# Altium PCB PCB Wall_V0.0.PcbDoc
Units mm, origin at the board's own origin, x right, y up, seen from the top; angles counter-clockwise.
Board outline 70 x 35 mm, 2 copper layers (Top Layer, Bottom Layer); 1 components, 7 nets, 11 pads, 0 vias.
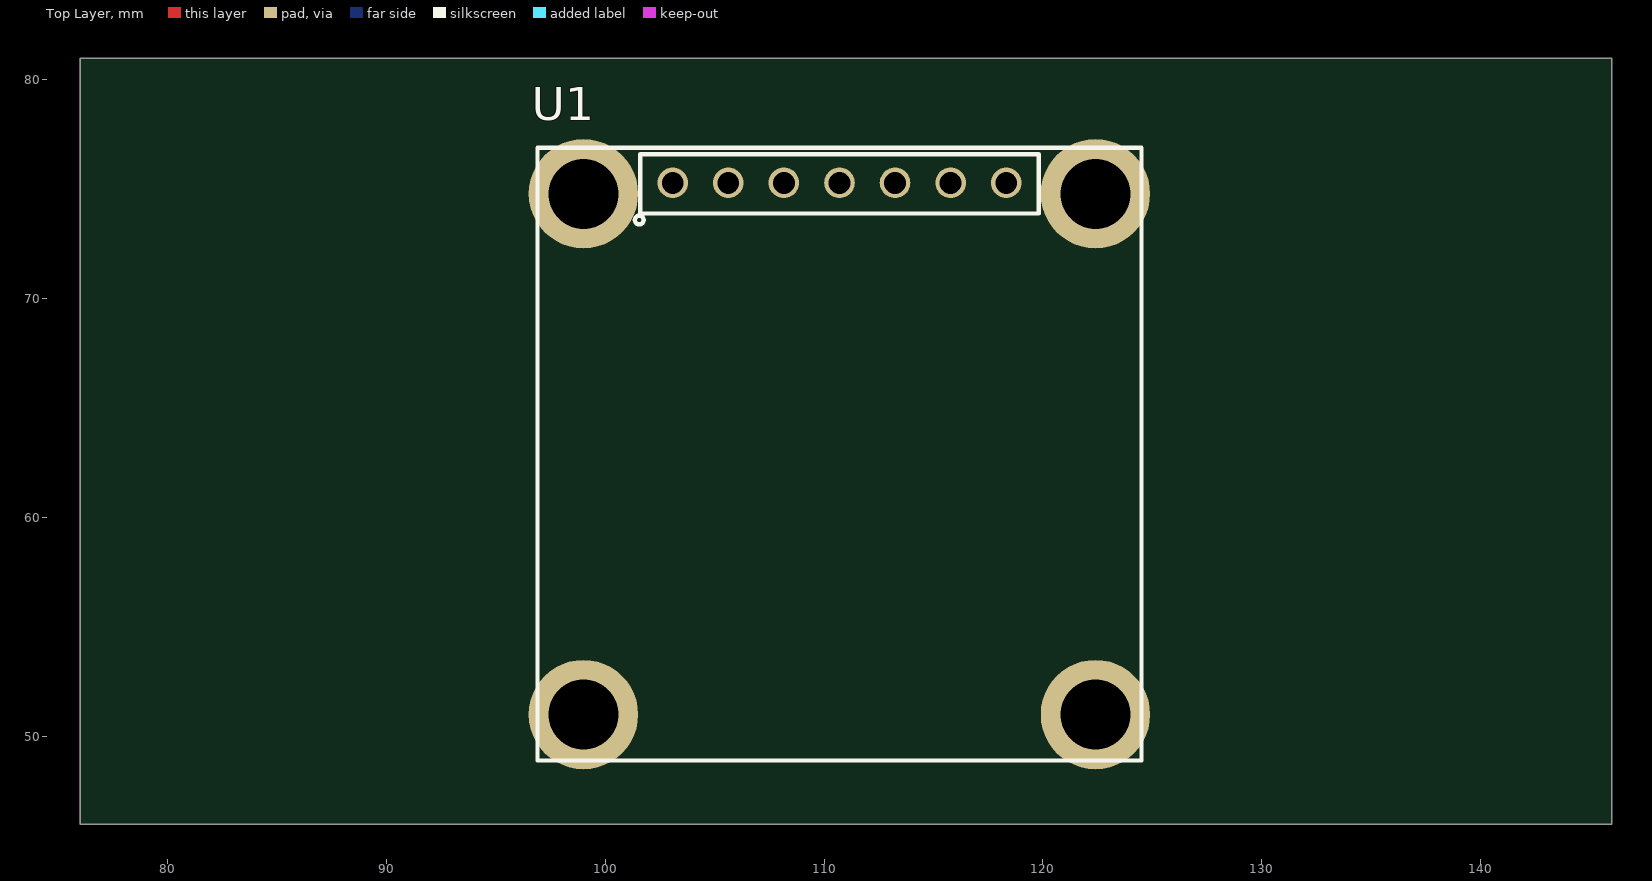
[diagram p0: Top Layer view]
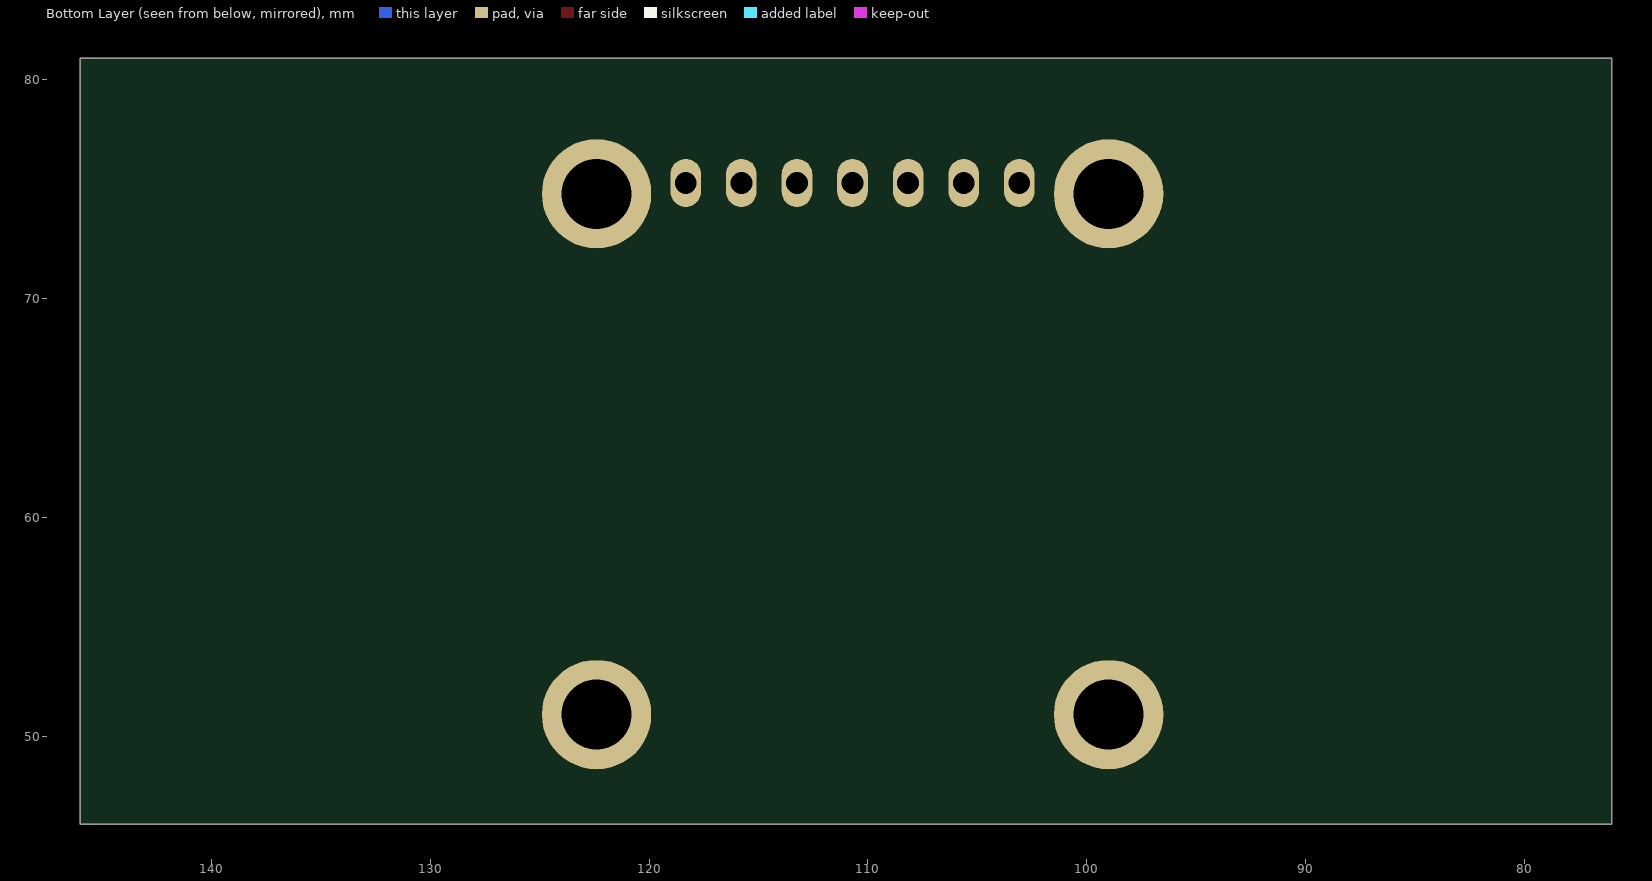
[diagram p1: Bottom Layer view, seen from below]

## Layer stack, top to bottom
Top Solder: solder mask 0.0102, Solder Resist, Dk 3.5
Top Layer: signal copper 0.0356
Dielectric 1: dielectric 0.32, FR-4, Dk 4.8
Bottom Layer: signal copper 0.0356
Bottom Solder: solder mask 0.0102, Solder Resist, Dk 3.5

## Board outline
76,46 146,46 146,81 76,81

## Design rules (kind name [scope] priority, off if disabled: settings)
Clearance [All] p1: gap=0.254 ignorepadtopadclearanceinfootprint=FALSE except(0: Arc-Hole Track-Hole SMDPad-Hole THPad-Hole Via-Hole Fill-Hole Poly-Hole Region-Hole Text-Hole)
PolygonConnect [All] p1: connectstyle=Relief reliefconductorwidth=0.254 reliefentries=4 polygonreliefangle="90 Angle" airgapwidth=0.254
RoutingVias [All] p1: holewidth=0.711 width=1.27 viastyle="Through Hole" minholewidth=0.711 minwidth=1.27 maxholewidth=0.711 maxwidth=1.27
SolderMaskExpansion [All] p1: expansion=0.102 istentingtop=FALSE
Width [All] p1: maxlimit=0.254 minlimit=0.254 preferedwidth=0.254
30 further rules are at their usual default settings.

## Components (designator, comment, footprint, x,y, rotation, side; value= is the part's Value field where it differs from the comment)
U1 "OLED_SSD1306" OLED_SSD1306_64_SPI 110.702,75.3 r0 top

## Footprints (in the part's own frame and the unit in brackets; to place one, negate y for a bottom-side part, rotate by r counter-clockwise, add the part's x,y. Pads: shape width x height; smd on the part's side, far side on the other; paste and mask are expansions set on the pad)
OLED_SSD1306_64_SPI [mm] "OLED SS1306 Breakout, 128X64, SPI"
  round 1.4 / inner round 1.4 / far side oval 1.4x2.2 hole 1 mask+0.1: 1(-7.62,0) 2(-5.08,0) 3(-2.54,0) 4(0,0) 5(2.54,0) 6(5.08,0) 7(7.62,0)
  round 5 hole 3.2: ""(-11.702,-24.3) ""(-11.702,-0.5) ""(11.698,-24.3) ""(11.698,-0.5)
  silkscreen extent -13.8,-26.4 13.8,1.6, body extent -13.7,-26.3 13.7,1.5, height 13.92

## Part data
U1: library part OLED_SSD1306_64_SPI, "OLED, SSD1306, 0.96\", 128X64, BREAKOUT SPI", MANF=-, MANF_P#=OLED_SSD1306_I2C, PARAM="2 Colors, 0.96\", 128X64", PARAM2="3.3/5VCC, -20~70oC"

## Nets (pads, with @x,y where several pads share a name; then routed paths per layer and width w, separated by ;. In a path a pad name is that pad's centre, name@x,y a point inside that pad or via, vN(x,y) a via of type N, cw(c..) or ccw(c..) an arc to the next point about the centre after c; other vN are vias at no path point)
+3V3_Main: U1.2
CS_DISP: U1.7
DC_DISP: U1.6
GND: U1.1
MOSI_DISP: U1.4
RES_DISP: U1.5
SCK_DISP: U1.3
pads on no net: U1.

## Keep-outs
Keep-Out Layer:
  the board outline again, w0.05